# Altium PCB Oso.PcbDoc
Units mm, origin at the board's own origin, x right, y up, seen from the top; angles counter-clockwise.
Board outline 76.45 x 75.69 mm, 2 copper layers (Top Layer, Bottom Layer); 43 components, 38 nets, 178 pads, 20 vias.
Unrouted connection lines stored in the file: 40.
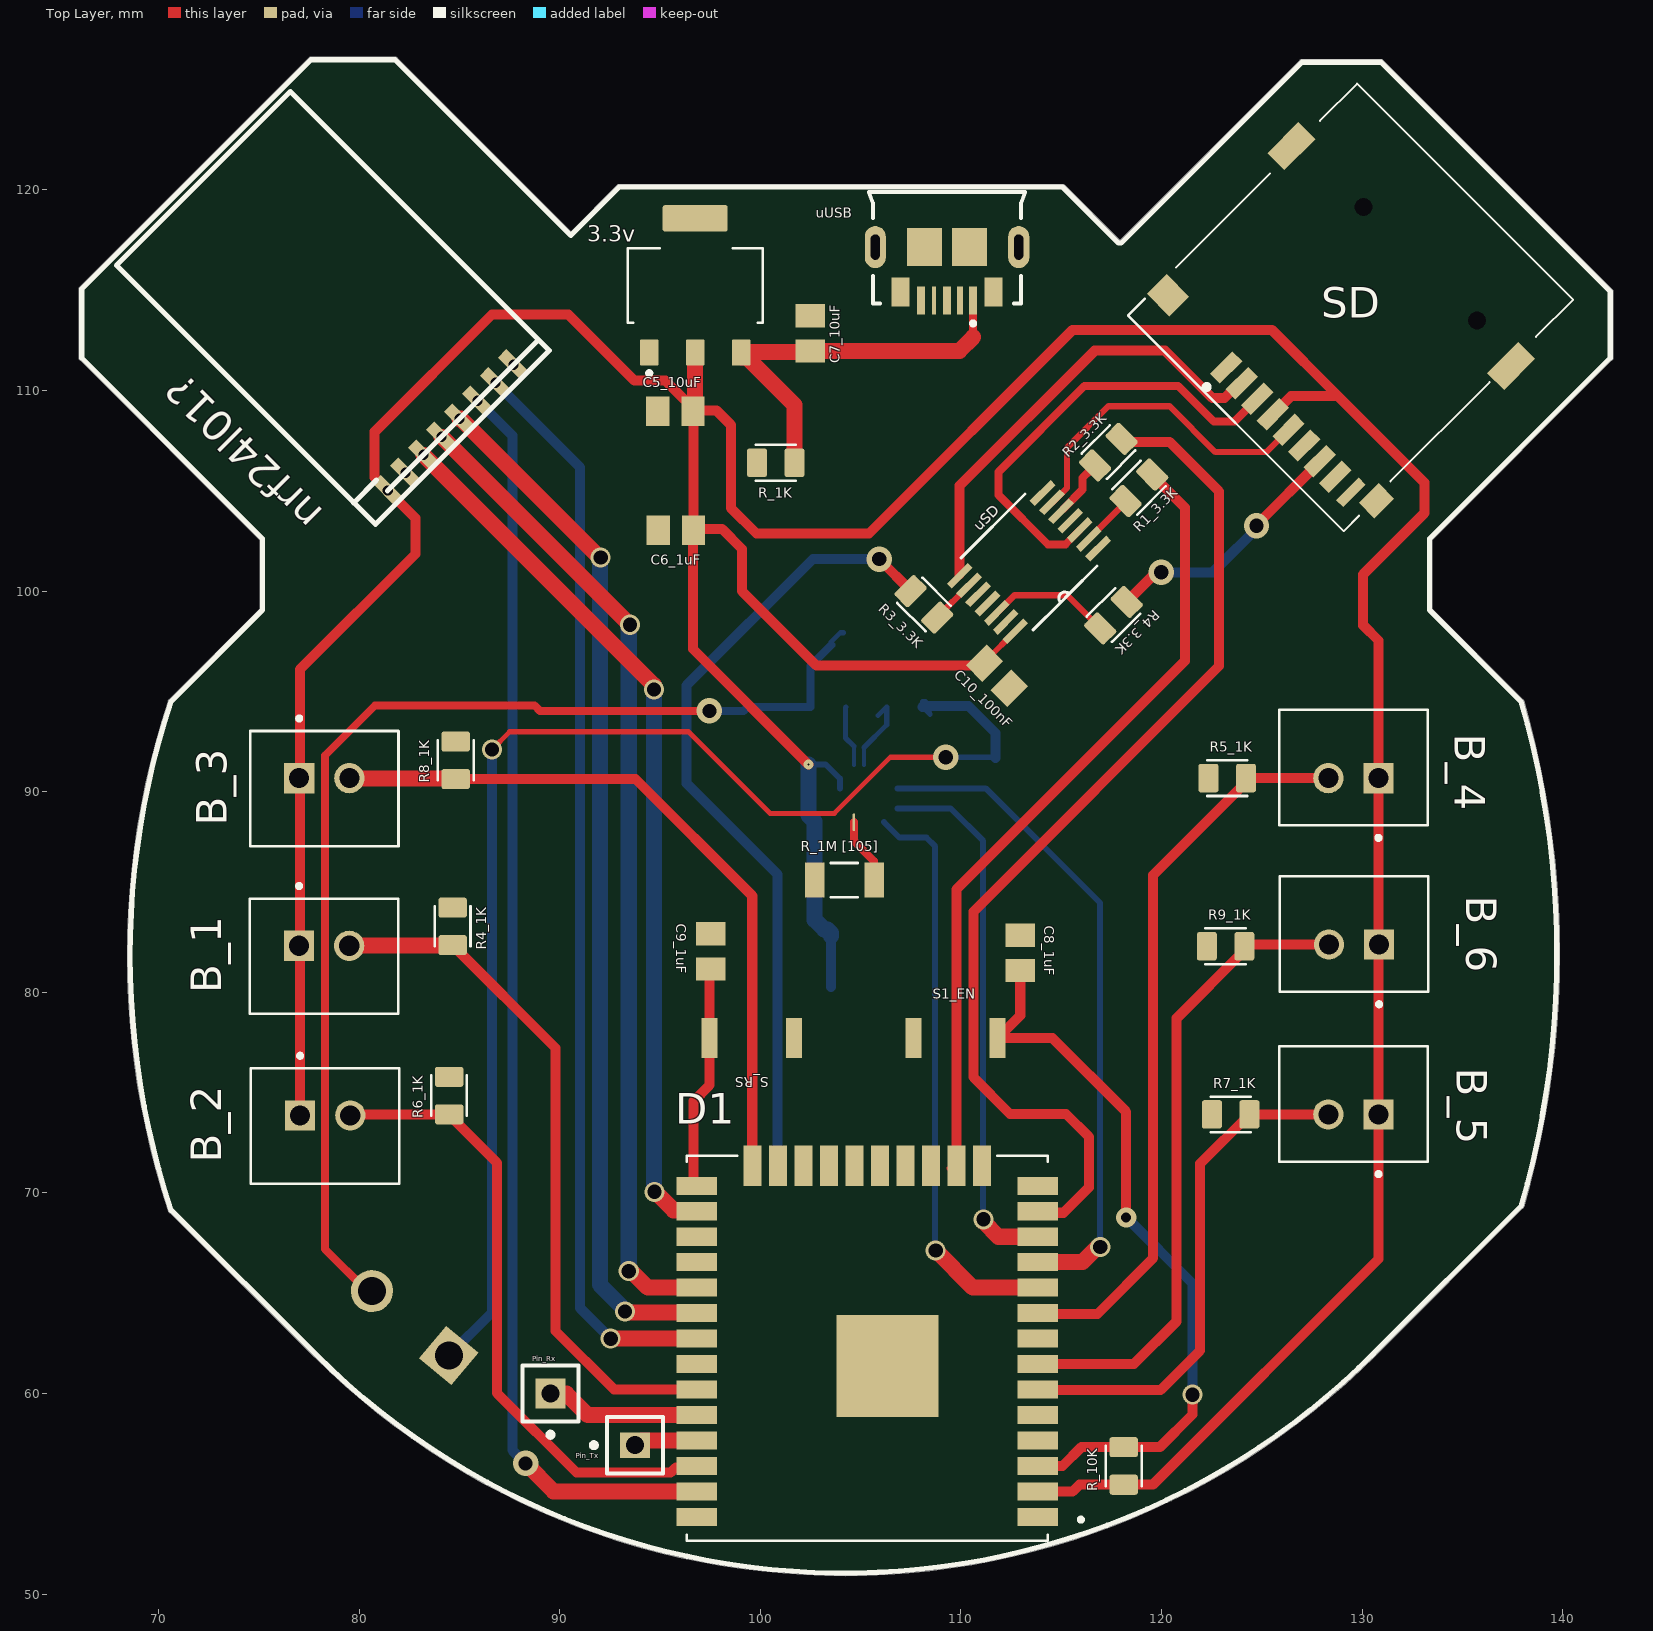
[diagram p0: Top Layer view]
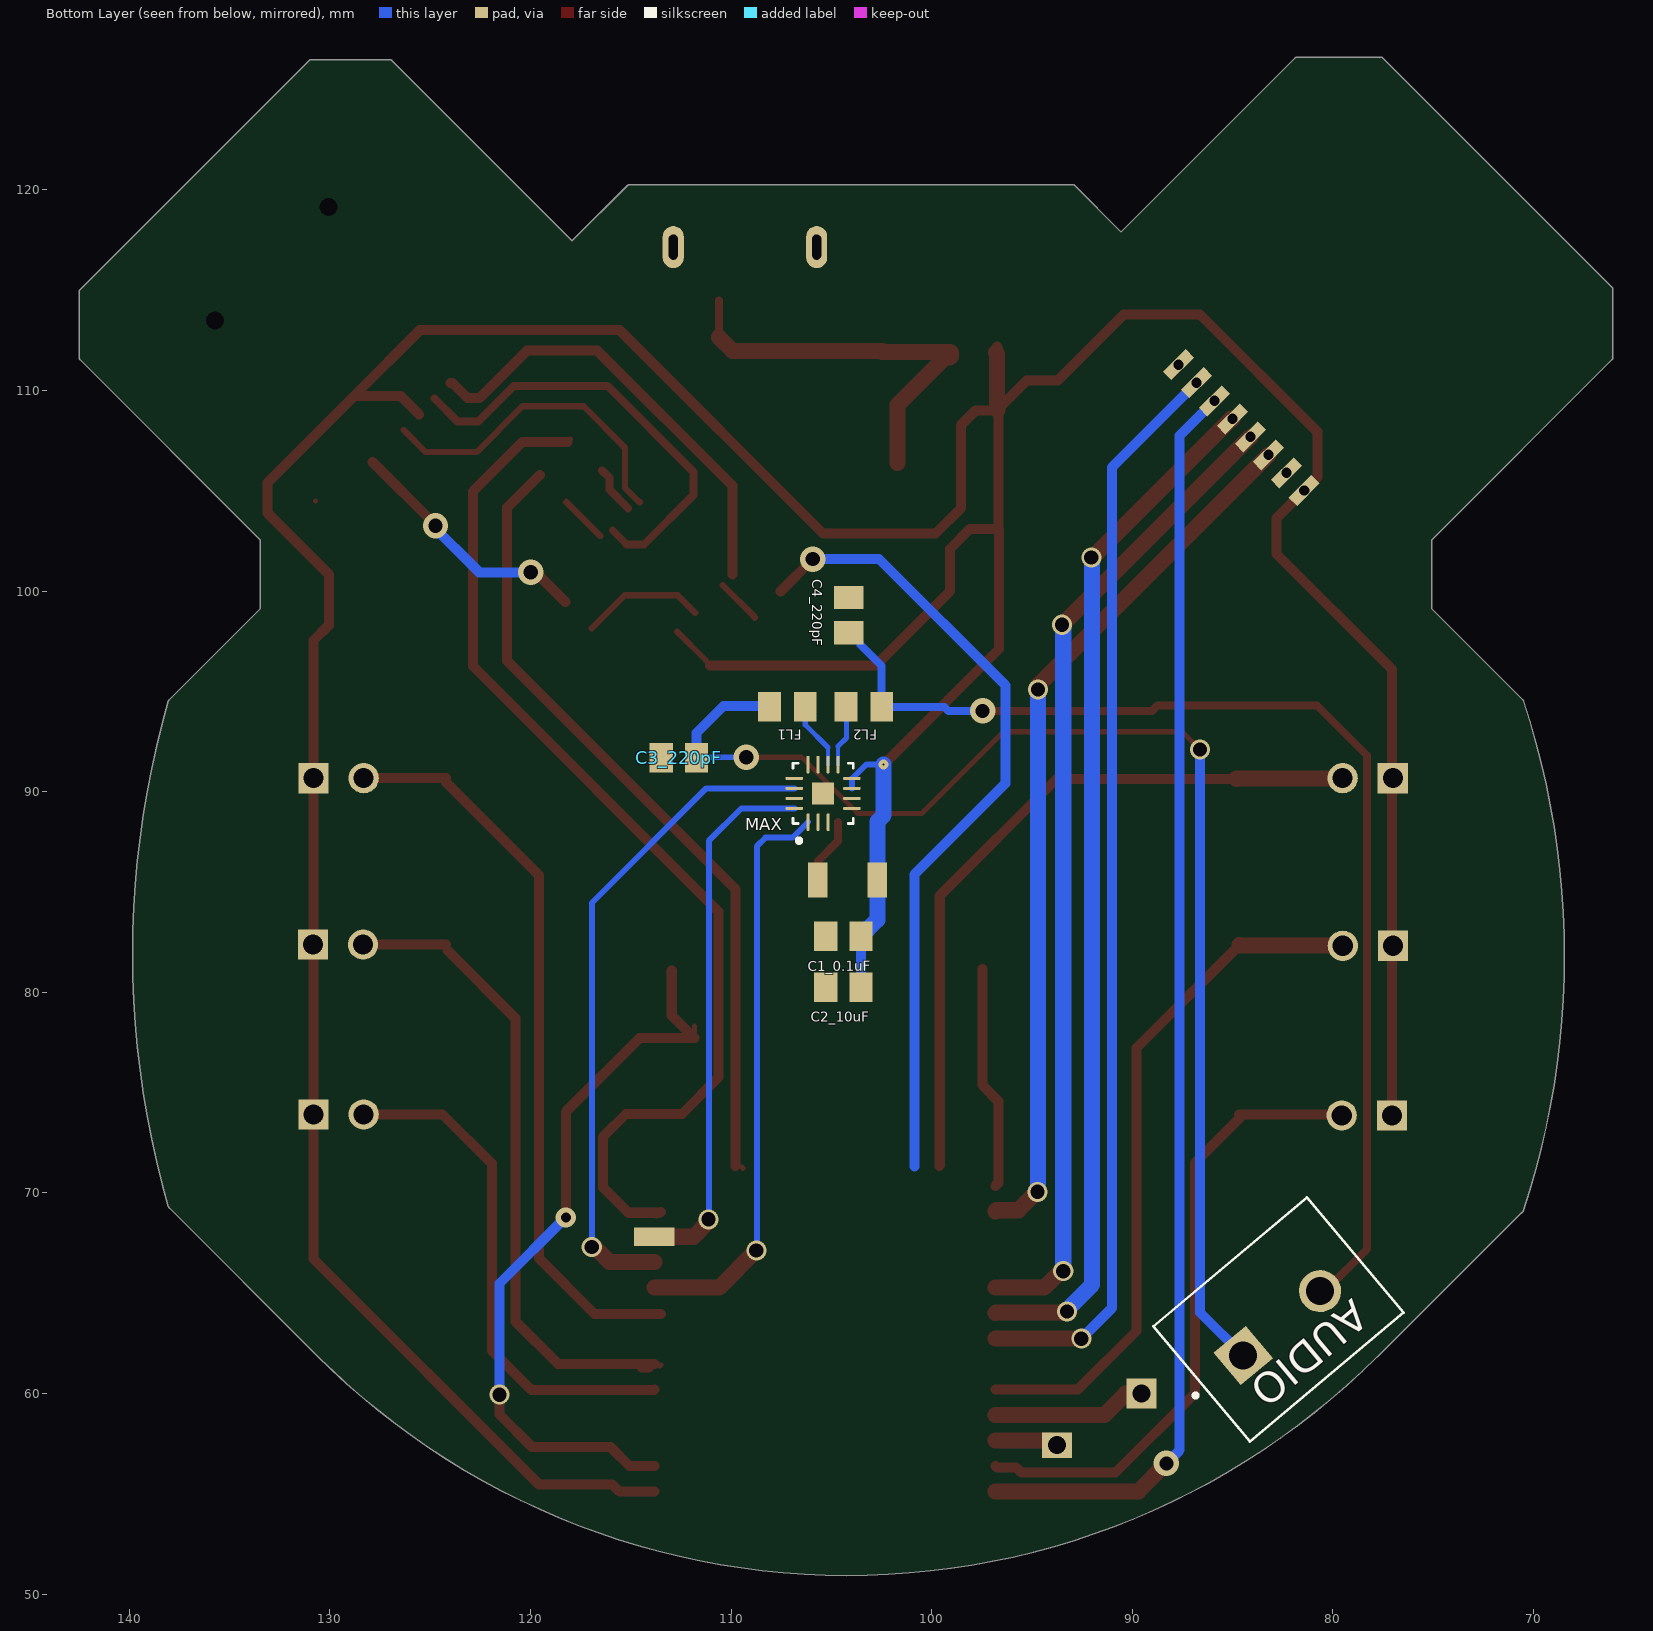
[diagram p1: Bottom Layer view, seen from below]

## Layer stack, top to bottom
Top Solder: solder mask 0.0102, Solder Resist, Dk 3.5
Top Layer: signal copper 0.0356
Dielectric 1: dielectric 0.32, FR-4, Dk 4.8
Bottom Layer: signal copper 0.0356
Bottom Solder: solder mask 0.0102, Solder Resist, Dk 3.5

## Board outline
70.503,69.095 cw(c109.019,81.83) 70.491,94.528 cw(c70.612,94.488) 70.522,94.579 70.522,94.578 75.057,99.113 75.057,102.563 66.077,111.543 cw(c66.167,111.633) 66.057,111.697 cw(c66.167,111.76) 66.04,111.76 66.04,115.062 cw(c66.167,115.062) 66.077,115.153 66.077,115.152 77.507,126.582 cw(c77.597,126.492) 77.66,126.602 cw(c77.724,126.492) 77.724,126.619 81.788,126.619 cw(c81.788,126.492) 81.879,126.582 81.878,126.582 90.551,117.909 92.874,120.232 92.873,120.232 cw(c92.964,120.142) 92.964,120.269 115.062,120.269 cw(c115.062,120.142) 115.153,120.232 115.152,120.232 117.919,117.465 126.91,126.455 126.909,126.455 cw(c127,126.365) 127,126.492 130.937,126.492 cw(c130.937,126.365) 131.028,126.455 131.027,126.455 142.457,115.025 142.457,115.026 cw(c142.367,114.935) 142.494,114.935 142.494,111.633 cw(c142.367,111.633) 142.457,111.542 142.457,111.543 133.477,102.563 133.477,99.113 138.012,94.578 cw(c137.922,94.488) 138.045,94.523 cw(c94.357,81.915) 139.828,81.915 cw(c94.357,81.915) 138.045,69.307 cw(c137.922,69.342) 137.97,69.224 130.683,61.937 ccw(c130.593,62.027) 130.684,61.937 130.683,61.937 cw(c104.18,88.33) 77.788,61.826 cw(c77.878,61.917) 77.788,61.827 70.587,69.014 cw(c70.624,69.135)

## Design rules (kind name [scope] priority, off if disabled: settings)
Clearance [All] p1: gap=0.254 ignorepadtopadclearanceinfootprint=FALSE except(0: Arc-Hole Track-Hole SMDPad-Hole THPad-Hole Via-Hole Fill-Hole Poly-Hole Region-Hole Text-Hole)
PolygonConnect [All] p1: connectstyle=Relief reliefconductorwidth=0.254 reliefentries=4 polygonreliefangle="90 Angle" airgapwidth=0.254
RoutingVias [All] p1: holewidth=0.711 width=1.27 viastyle="Through Hole" minholewidth=0.711 minwidth=1.27 maxholewidth=0.711 maxwidth=1.27
SolderMaskExpansion [All] p1: expansion=0.102 istentingtop=FALSE
Width [All] p1: maxlimit=0.8 minlimit=0.254 preferedwidth=0.8
30 further rules are at their usual default settings.

## Components (designator, comment, footprint, x,y, rotation, side; value= is the part's Value field where it differs from the comment)
3.3v "AMS1117-3.3" SOT229P700X180-4N 96.749,115.24 r0 top (schematic designator U)
AUDIO "KF301-2P" HANDSON_KF301-2P 82.55,63.5 r140 bottom
B_1 "" JST_B2B-XH-A(LF)(SN) 78.252,81.796 r180 top
B_2 "" JST_B2B-XH-A(LF)(SN) 78.303,73.338 r180 top
B_3 "" JST_B2B-XH-A(LF)(SN) 78.257,90.153 r180 top
B_4 "" JST_B2B-XH-A(LF)(SN) 129.56,91.203 r0 top
B_5 "" JST_B2B-XH-A(LF)(SN) 129.56,74.439 r0 top
B_6 "" JST_B2B-XH-A(LF)(SN) 129.591,82.906 r0 top
C1_0.1uF "0805" CAPC2012X94N 104.394,82.804 r0 bottom
C2_10uF "0805" CAPC2012X94N 104.394,80.264 r0 bottom
C3_220pF "0805" CAPC2012X94N 112.598,91.694 r0 bottom
C4_220pF "0805" CAPC2012X94N 104.14,98.806 r90 bottom
C5_10uF "0805" CAPC2012X94N 95.758,108.966 r0 top
C6_1uF "0805" CAPC2012X94N 95.783,103.048 r0 top
C7_10uF "0805" CAPC2012X94N 102.489,112.852 r270 top
C8_1uF "0805" CAPC2012X94N 112.954,81.966 r270 top
C9_1uF "0805" CAPC2012X94N 97.536,82.042 r270 top
C10_100nF "0805" CAPC2012X94N 111.785,95.783 r135 top
D1 "ESP32_MODULE_2" XCVR_ESP32-WROOM-32U 105.324,62.255 r180 top
FL1 "Ferrite Beads" BEADC2012X105N 107.188,94.234 r0 bottom
FL2 "Ferrite Beads" BEADC2012X105N 103.378,94.234 r180 bottom
MAX "MAX98357AETE+" QFN50P300X300X80-17N 105.41,89.916 r90 bottom
nrf24l01? "SMD" NRF24L01 81.944,104.463 r135 top
Pin_Rx "Socket" PIN1#1 89.535,59.995 r180 top
Pin_Tx "Socket" PIN1#2 93.745,57.423 r90 top
R1_3.3K "0805" RESC2012X65N 118.872,105.156 r45 top
R2_3.3K "0805" RESC2012X65N 117.348,106.934 r45 top
R3_3.3K "0805" RESC2012X65N 108.153,99.339 r135 top
R4_1K "0805" RESC2012X65N 84.658,83.287 r90 top
R4_3.3K "0805" RESC2012X65N 117.602,98.806 r45 top
R5_1K "0805" RESC2012X65N 123.271,90.678 r0 top
R6_1K "0805" RESC2012X65N 84.48,74.854 r90 top
R7_1K "0805" RESC2012X65N 123.444,73.914 r0 top
R8_1K "0805" RESC2012X65N 84.811,91.567 r90 top
R9_1K "0805" RESC2012X65N 123.19,82.296 r0 top
R_1K "0805" RESC2012X65N 100.767,106.401 r0 top
"R_1M [105]" "RC1206" RESC3116X65N 104.184,85.598 r180 top
R_10K "0805" RESC2012X65N 118.11,56.388 r90 top
S1_EN "SW-PB" SKRK 109.728,77.724 r180 top
S_RS "SW-PB" SKRK 99.568,77.724 r0 top
SD "Micro SD Card Holder" "Micro SD Card Holder" 130.117,114.255 r135 top
uSD "74LVC125APW,118" SOP65P640X110-14N 113.386,101.448 r225 top
uUSB "USB3075-30-A" GCT_USB3075-30-A 110.603,114.5 r180 top (schematic designator J1)

## Footprints (in the part's own frame and the unit in brackets; to place one, negate y for a bottom-side part, rotate by r counter-clockwise, add the part's x,y. Pads: shape width x height; smd on the part's side, far side on the other; paste and mask are expansions set on the pad)
BEADC2012X105N [mm]
  rect 1.14x1.47 smd: 1(-0.89,0) 2(0.89,0)
CAPC2012X94N [mm]
  rect 1.16x1.47 smd: 1(-0.88,0) 2(0.88,0)
GCT_USB3075-30-A [mm]
  rect 0.4x1.4 smd: 1(0,0) 3(1.3,0) 5(2.6,0)
  rect 0.3x1.4 smd: 2(0.65,0)
  rect 0.2x1.4 smd: 4(1.95,0)
  rect 0.9x1.45 smd: S1(-1.02,-0.42) S2(3.62,-0.42)
  rect 1.75x1.9 smd: S3(0.175,-2.65) S4(2.425,-2.65)
  oval 1.05x2.1 hole 0.45 slot 1.25 at 90 deg: S5(-2.275,-2.65) S6(4.875,-2.65)
  silkscreen extent -2.6,-5.4 5.2,1.25, body extent -2.63,-5.31 5.17,0.24, height 2.7
HANDSON_KF301-2P [mm]
  rect 2.1x2.1 hole 1.4: 1(-2.5,0)
  round 2.1 hole 1.4: 2(2.5,0)
  silkscreen extent -5.7,-3.5 5,4
JST_B2B-XH-A(LF)(SN) [mm]
  rect 1.508x1.508 hole 1: 1(1.25,-0.525)
  round 1.508 hole 1: 2(-1.25,-0.525)
  silkscreen extent -3.7,-3.6 3.7,2.88, body extent -3.7,-2.96 3.7,2.79, height 7
"Micro SD Card Holder" [mm]
  rect 0.7x1.6 smd paste+0 mask+0: 1(2.684,7.075) 2(1.584,7.075) 3(0.484,7.075) 4(-0.616,7.075) 5(-1.716,7.075) 6(-2.816,7.075) 7(-3.916,7.075) 8(-5.016,7.075)
  rect 1.1x1.4 smd paste+0 mask+0: 10(-7.316,6.475)
  rect 1.6x1.4 smd paste+0 mask+0: 11(7.284,6.575)
  rect 1.2x2.2 smd paste+0 mask+0: 12(-7.316,-3.025) 13(8.184,-3.025)
  rect 0.5x1.6 smd paste+0 mask+0: Cd(-6.116,7.075)
  round 0 hole 0.9 unplated paste-1000 mask+0: ""(-4.516,-3.425) ""(3.484,-3.425)
  silkscreen extent -7.23,-7.55 8.08,8.7, body extent -7.57,-7.42 8.43,7.83, height 1.85
NRF24L01 [mil] "smd"
  rect 62.99x23.62 hole 20: 1(30,-1) 2(30,-49.99) 3(30,-100) 4(30,-150) 5(30,-200) 6(30,-250) 7(30,-300) 8(30,-350)
  silkscreen extent 0,-420 719,63, body extent -3,-412 706,60, height 32
PIN1#1 [mm] "Connector; Plug"
  rect 1.5x1.5 hole 0.9: 1(0,0)
  silkscreen extent -1.4,-1.4 1.4,2.17
PIN1#2 [mm] "Connector; Plug"
  rect 1.25x1.5 hole 0.9: 1(0,0)
  silkscreen extent -1.4,-1.4 1.4,2.17
QFN50P300X300X80-17N [mm]
  rrect50% 0.86x0.15 smd: 1(-1.435,0.75) 2(-1.435,0.25) 3(-1.435,-0.25) 9(1.435,-0.75) 10(1.435,-0.25) 11(1.435,0.25) 12(1.435,0.75)
  rrect50% 0.86x0.12 smd far side: 4(-1.435,-0.75)
  rrect50% 0.15x0.86 smd: 5(-0.75,-1.435) 6(-0.25,-1.435) 7(0.25,-1.435) 8(0.75,-1.435) 13(0.75,1.435) 14(0.25,1.435) 15(-0.25,1.435) 16(-0.75,1.435)
  rect 1.1x1.1 smd paste-2: 17(0,0)
  silkscreen extent -2.46,-1.5 1.5,1.5, body extent -1.5,-1.5 1.5,1.5, height 0.75
RESC2012X65N [mm]
  rrect25% 1x1.42 smd: 1(-0.935,0) 2(0.935,0)
  silkscreen extent -1,-0.89 1,0.89
RESC3116X65N [mm]
  rect 0.97x1.73 all layers, no hole: 1(-1.48,0) 2(1.48,0)
  silkscreen extent -0.67,-0.85 0.67,0.85
SKRK [mm]
  rect 0.8x2 smd: 1(-2.1,0) 2(2.1,0)
SOP65P640X110-14N [mil]
  rect 58x14 smd: 1(-115,77) 2(-115,51) 3(-115,26) 4(-115,0) 5(-115,-26) 6(-115,-51) 7(-115,-77) 8(115,-77) 9(115,-51) 10(115,-26) 11(115,0) 12(115,26) 13(115,51) 14(115,77)
  silkscreen extent -89,-100 89,100, body extent -131,-98 121,98, height 43
SOT229P700X180-4N [mm]
  rrect15% 0.93x1.31 smd: 1(-2.29,-3.345) 2(0,-3.345) 3(2.29,-3.345)
  rrect15% 3.24x1.31 smd: 4(0,3.345)
  silkscreen extent -3.36,-4.47 3.36,1.86, body extent -3.35,-3.52 3.35,3.78, height 1.91
XCVR_ESP32-WROOM-32U [mm]
  rect 2x0.9 smd: 1(-8.5,8.41) 2(-8.5,7.14) 3(-8.5,5.87) 4(-8.5,4.6) 5(-8.5,3.33) 6(-8.5,2.06) 7(-8.5,0.79) 8(-8.5,-0.48) 9(-8.5,-1.75) 10(-8.5,-3.02) 11(-8.5,-4.29) 13(-8.5,-6.83) 14(-8.5,-8.1) 25(8.5,-8.1) 26(8.5,-6.83) 27(8.5,-5.56) 28(8.5,-4.29) 29(8.5,-3.02) 30(8.5,-1.75) 31(8.5,-0.48) 32(8.5,0.79) 33(8.5,2.06) 34(8.5,3.33) 35(8.5,4.6) 36(8.5,5.87) 37(8.5,7.14) 38(8.5,8.41)
  rect 2x0.9 all layers, no hole: 12(-8.5,-5.56)
  rect 0.9x2 smd: 15(-5.715,-9.1) 16(-4.445,-9.1) 17(-3.175,-9.1) 18(-1.905,-9.1) 19(-0.635,-9.1) 20(0.635,-9.1) 21(1.905,-9.1) 22(3.175,-9.1) 23(4.445,-9.1) 24(5.715,-9.1)
  rect 5.08x5.08 smd: 39(-1.016,0.889)
  silkscreen extent -10.75,-9.6 9,9.6, body extent -9.04,-9.65 9.04,9.59, height 3.4

## Part data
3.3v: "Sot223/Pkg 1-Amp 3.3-Volt Low Drop Out Voltage Regulatator", Package=None, Availability=Unavailable, MF="Advanced Monolithic Systems", MP=AMS1117-3.3, Price=None, SnapEDA_Link=https://www.snapeda.com/parts/AMS1117-3.3/Advanced%20Monolithic%20Systems/view-part/53450/?ref=snap
AUDIO: "2 Pin Terminal Block 5mm Pitch", Package=Package, Availability=Unavailable, MF="Handson Technology", MP=KF301-2P, Price=None, SnapEDA_Link=https://www.snapeda.com/parts/KF301-2P/Handson%20Technology/view-part/4276957/?ref=snap
B_1 B_2 B_3 B_4 B_5 B_6: library part B2B-XH-A(LF)(SN), "Connector Header Through Hole 2 position 0.098 (2.50mm)", Package=None, Availability="In Stock", Check_prices=https://www.snapeda.com/parts/B2B-XH-A(LF)(SN)/JST%20Sales%20America%20Inc./view-part/492310/?ref=eda, MF="JST Sales", MP=B2B-XH-A(LF)(SN), Price=None, Purchase-URL=https://pricing.snapeda.com/search/part/B2B-XH-A(LF)(SN)/?ref=eda, SnapEDA_Link=https://www.snapeda.com/parts/B2B-XH-A(LF)(SN)/JST%20Sales%20America%20Inc./view-part/492310/?ref=snap
C1_0.1uF C2_10uF C3_220pF C4_220pF C5_10uF C6_1uF C7_10uF C8_1uF C9_1uF C10_100nF: library part 0805YC103J4T2A, "10000pF Â±5% 16V Ceramic Capacitor X7R 0805 _2012 Metric_", Package="2012 AVX", Availability=Unavailable, MF=AVX, MP=0805YC103J4T2A, Price=None, SnapEDA_Link=https://www.snapeda.com/parts/0805YC103J4T2A/AVX/view-part/606803/?ref=snap
FL1 FL2: library part BLM21PG221BH1D, Package=None, Availability=Unavailable, MP=BLM21PG221BH1D, Price=None
MAX: "Amplifier IC 1-Channel _Mono_ Class D 16-TQFN _3x3_", Package="TQFN-16 Maxim", Availability=Unavailable, MF="Maxim Integrated", MP=MAX98357AETE+, Price=None, SnapEDA_Link=https://www.snapeda.com/parts/MAX98357AETE%2B/Maxim%20Integrated/view-part/229145/?ref=snap
nrf24l01?: library part nrf24l01_smd
R1_3.3K R2_3.3K R3_3.3K R4_1K R4_3.3K R5_1K R6_1K R7_1K R8_1K R9_1K R_1K R_10K: library part 2-2176053-0, "RES 0.33 OHM 1% 1/4W 0805", Power_Rating=".25 W", Resistance=.33, Tolerance=1%, Availability=Unavailable, EU_RoHS_Compliance="Compliant with Exemptions", MF="TE Connectivity", MP=2-2176053-0, Package=0805, Price=None, SnapEDA_Link=https://www.snapeda.com/parts/2-2176053-0/TE%20Connectivity/view-part/2214508/?ref=snap
"R_1M [105]": library part RC1206JR-0713RL, "13 Ohms Â±5% 0.25W, 1/4W Chip Resistor 1206 _3216 Metric_ Moisture Resistant Thick Film", Package="3116 Yageo", Availability=Unavailable, MF=Yageo, MP=RC1206JR-0713RL, Price=None, SnapEDA_Link=https://www.snapeda.com/parts/RC1206JR-0713RL/Yageo/view-part/105893/?ref=snap
S1_EN S_RS: "Switch", LatestRevisionDate=17-Jul-2002, LatestRevisionNote="Re-released for DXP Platform.", PackageDescription="Switch; 2 Leads", PackageReference=SPST-2, Published=24-Mar-1999, Publisher="Altium Limited"
uSD: "IC BUF NON-INVERT 3.6V 14TSSOP", Package=None, Availability=Good, Check_prices=https://www.snapeda.com/parts/74LVC125APW,118/Nexperia/view-part/5160321/?ref=eda, MF="Nexperia USA Inc.", MP=74LVC125APW,118, Price=None, Purchase-URL=https://pricing.snapeda.com/search/part/74LVC125APW,118/?ref=eda, SnapEDA_Link=https://www.snapeda.com/parts/74LVC125APW,118/Nexperia/view-part/5160321/?ref=snap
uUSB: "USB - micro B USB 2.0 Receptacle Connector 5 Position Surface Mount, Right Angle; Through Hole", Package=None, Digi-Key_Part_Number=2073-USB3075-30-ACT-ND, Digi-Key_Purchase_URL=https://www.digikey.com/product-detail/en/gct/USB3075-30-A/2073-USB3075-30-ACT-ND/9859705?utm_source=snapeda&utm_medium=aggregator&utm_campaign=symbol, MF="Global Connector Technology", MP=USB3075-30-A, SnapEDA_Link=https://www.snapeda.com/parts/USB3075-30-A/Global%20Connector%20Technology/view-part/229370/?ref=snap
Pin_Rx Pin_Tx: LatestRevisionDate=17-Jul-2002, LatestRevisionNote="Re-released for DXP Platform.", Publisher="Altium Limited"

## Via types
v1: diameter 1, hole 0.711, Top Layer to Bottom Layer, 12 vias
v2: diameter 1.27, hole 0.711, Top Layer to Bottom Layer, 6 vias
v3: diameter 1, hole 0.5, Top Layer to Bottom Layer, 1 vias
v4: diameter 0.5, hole 0.1, Top Layer to Bottom Layer, 1 vias

## Nets (pads, with @x,y where several pads share a name; then routed paths per layer and width w, separated by ;. In a path a pad name is that pad's centre, name@x,y a point inside that pad or via, vN(x,y) a via of type N, cw(c..) or ccw(c..) an arc to the next point about the centre after c; other vN are vias at no path point)
3v3: 3.3v.2 "R_1M [105].2" B_1.1 B_2.1 B_3.1 B_4.1 B_5.1 B_6.1 C1_0.1uF.1 C2_10uF.1 C5_10uF.2 C6_1uF.2 C10_100nF.2 D1.2 MAX.7 MAX.8 nrf24l01?.1 R_10K.1 SD.4 uSD.14 | length 229.6
  Top Layer w0.254: C6_1uF.2 C6_1uF.2@96.714,103.099 ; C5_10uF.2@96.716,109.043 C5_10uF.2@96.742,109.017 ; C10_100nF.2@111.054,96.296 C10_100nF.2 ; 128.764,109.76 128.764,109.728 128.78,109.728
  Top Layer w0.3: C10_100nF.2@111.269,96.565 uSD.14
  Top Layer w0.5: B_2.1@77.038,73.758 77.038,90.678 77.038,96.088 82.804,101.854 82.804,103.639 nrf24l01?.1 80.772,105.671 80.772,107.95 86.614,113.792 90.424,113.792 93.726,110.49 95.269,110.49 C5_10uF.2@96.638,109.121 ; C6_1uF.2@96.638,103.048 96.638,97.113 v4(102.387,91.364) ; C6_1uF.2 C5_10uF.2@96.663,108.941 ; C6_1uF.2@96.714,103.099 98.095,103.099 99.085,102.108 99.085,100 102.789,96.296 C10_100nF.2@111.054,96.296 ; 3.3v.2@96.723,112.166 3.3v.2@96.749,112.192 ; C5_10uF.2@96.742,109.017 97.801,109.017 98.527,108.291 98.527,104.147 99.804,102.87 105.41,102.87 115.57,113.03 125.494,113.03 128.764,109.76 ; D1.2 115.567,55.115 115.905,55.453 R_10K.1 119.563,55.453 130.81,66.7 B_5.1 B_4.1 130.81,97.536 130.048,98.298 130.048,100.838 133.096,103.886 133.096,105.412 128.78,109.728 ; SD.4 126.461,109.728 128.764,109.728
  Top Layer w0.8: C5_10uF.2@96.716,109.044 96.734,109.062 96.734,111.83 3.3v.2@96.799,111.895
  Bottom Layer w0.1: MAX.8 MAX.8@103.985,90.666
  Bottom Layer w0.3: v4(102.387,91.364) 103.247,91.364 MAX.8@103.945,90.666 ; MAX.7 MAX.8
  Bottom Layer w0.5: C2_10uF.1 C1_0.1uF.1
  Bottom Layer w0.8: v4(102.387,91.364) 102.387,88.829 102.704,88.513 102.704,85.598 102.704,83.614 103.179,83.139 103.334,83.139 103.514,82.959 C1_0.1uF.1
GND: 3.3v.1 C1_0.1uF.2 C2_10uF.2 C3_220pF.2 C4_220pF.2 C5_10uF.1 C6_1uF.1 C7_10uF.1 C8_1uF.1 C9_1uF.1 C10_100nF.1 D1.1 D1.15 D1.38 D1.39 MAX.2 MAX.3 MAX.11 MAX.15 nrf24l01?.2 R4_1K.2 R5_1K.1 R6_1K.2 R7_1K.1 R8_1K.2 R9_1K.1 R_1K.1 S1_EN.2 S_RS.2 SD.10 SD.11 SD.12 SD.13 uSD.1 uSD.4 uSD.7 uSD.10 uSD.13 uUSB.5 | length 0
NetAUDIO_1: AUDIO.1 C3_220pF.1 FL1.2 | length 66.5
  Top Layer w0.254: v1(86.614,92.1) 87.503,92.989 96.418,92.989 100.482,88.925 103.683,88.925 106.477,91.719 v2(109.245,91.719)
  Bottom Layer w0.254: v2(109.245,91.719) 111.693,91.719 C3_220pF.1 ; FL1.2 108.078,94.489 108.181,94.489 108.227,94.488 108.259,94.477 108.305,94.33 108.454,93.858 FL1.2
  Bottom Layer w0.5: AUDIO.1 86.614,64.042 v1(86.614,92.1) ; FL1.2 108.114,94.27 110.378,94.27 111.718,92.93 C3_220pF.1
NetAUDIO_2: AUDIO.2 C4_220pF.1 FL2.2 | length 57.7
  Top Layer w0.254: AUDIO.2@80.384,65.107 AUDIO.2
  Top Layer w0.4: AUDIO.2@80.384,65.107 78.283,67.208 78.283,91.796 80.797,94.31 88.737,94.31 89.017,94.031 v2(97.46,94.031)
  Bottom Layer w0.254: 103.532,97.318 103.532,97.473 103.985,97.926 C4_220pF.1
  Bottom Layer w0.4: v2(97.46,94.031) 99.162,94.031 99.365,94.234 FL2.2 102.488,96.274 103.532,97.318
NetB_1_2: B_1.2 D1.33 R4_1K.1 | length 35
  Top Layer w0.5: B_1.2 B_1.2@79.654,82.169 ; R4_1K.1 89.789,77.221 89.789,63.119 92.713,60.195 D1.33
  Top Layer w0.8: B_1.2 79.517,82.337 84.643,82.337 R4_1K.1
NetB_2_2: B_2.2 D1.36 R6_1K.1 | length 31.7
  Top Layer w0.254: R6_1K.1@84.663,73.704 R6_1K.1@84.663,73.914
  Top Layer w0.5: B_2.2@79.553,73.914 R6_1K.1@84.663,73.914 ; R6_1K.1@84.663,73.704 86.868,71.499 86.868,60.018 90.828,56.058 95.529,56.058 95.783,56.312 96.75,56.312 D1.36
NetB_3_2: B_3.2 D1.24 R8_1K.1 | length 36
  Top Layer w0.5: R8_1K.1 93.772,90.632 99.593,84.811 99.593,71.371 D1.24
  Top Layer w0.8: B_3.2 79.53,90.655 84.788,90.655 R8_1K.1
NetB_4_2: B_4.2 D1.9 R5_1K.2 | length 37.2
  Top Layer w0.254: R5_1K.2@124.206,90.468 R5_1K.2
  Top Layer w0.5: D1.9@113.5,63.969 116.801,63.969 119.583,66.751 119.583,85.845 R5_1K.2@124.206,90.468 ; R5_1K.2 B_4.2
NetB_5_2: B_5.2 D1.6 R7_1K.2 | length 25.6
  Top Layer w0.5: D1.6 113.847,60.173 119.956,60.173 121.92,62.137 121.92,71.455 R7_1K.2 B_5.2
NetB_6_2: B_6.2 D1.7 R9_1K.2 | length 32.6
  Top Layer w0.254: D1.7@113.5,61.429 D1.7@113.551,61.379 ; R9_1K.2@124.125,82.086 R9_1K.2 R9_1K.2@124.21,82.381
  Top Layer w0.5: D1.7 118.615,61.465 120.752,63.602 120.752,78.713 R9_1K.2@124.125,82.086 ; D1.7@114.079,61.29 D1.7@114.46,61.29 ; R9_1K.2@124.21,82.381 B_6.2
NetC7_10uF_2: 3.3v.3 C7_10uF.2 R_1K.2 uUSB.1 | length 20.5
  Top Layer w0.4: 110.603,112.66 uUSB.1
  Top Layer w0.8: R_1K.2 101.702,109.279 99.341,111.64 99.104,111.64 99.039,111.705 3.3v.3 99.077,111.933 102.45,111.933 C7_10uF.2 109.915,111.972 110.603,112.66
NetC8_1uF_2: C8_1uF.2 D1.3 R_10K.2 S1_EN.1 | length 37.7
  Top Layer w0.254: S1_EN.1 S1_EN.1@111.828,78.324 ; v1@121.488,59.893 v1(121.539,59.944)
  Top Layer w0.5: C8_1uF.2 112.954,78.85 S1_EN.1 114.554,77.724 118.237,74.041 v3(118.237,68.783) ; D1.3 115.059,56.385 115.997,57.323 R_10K.2 119.909,57.323 121.539,58.953 v1(121.539,59.944)
  Bottom Layer w0.5: v3(118.237,68.783) 121.539,65.481 v1(121.539,59.944)
NetC9_1uF_2: C9_1uF.2 D1.25 S_RS.1 | length 11.2
  Top Layer w0.5: D1.25 96.672,70.507 96.672,74.574 97.468,75.37 S_RS.1 C9_1uF.2@97.468,81.162
NetD1_8: D1.8 uSD.11
NetD1_10: D1.10 MAX.1 | length 29
  Top Layer w0.8: v1(108.737,67.132) 110.594,65.275 D1.10
  Bottom Layer w0.3: MAX.1 106.923,87.718 108.269,87.718 108.712,87.274 v1@108.712,67.132
NetD1_11: D1.11 MAX.14 | length 33
  Top Layer w0.8: D1.11 116.05,66.545 116.814,67.31 v1(116.942,67.31)
  Bottom Layer w0.3: MAX.14 111.231,90.166 116.942,84.455 v1(116.942,67.31)
NetD1_12: D1.12 MAX.16 | length 26.9
  Top Layer w0.8: v1(111.125,68.682) 111.125,68.555 111.864,67.815 D1.12
  Bottom Layer w0.3: MAX.16 109.487,89.166 111.1,87.554 v1@111.1,68.682
NetD1_13: D1.13 R2_3.3K.2 | length 53.3
  Top Layer w0.254: R2_3.3K.2 R2_3.3K.2@118.158,107.447
  Top Layer w0.5: D1.13@113.5,69.049 113.504,69.046 D1.13@113.618,69.012 ; D1.13@113.589,69.012 D1.13@113.618,69.012 ; D1.13@113.715,68.983 D1.13@113.618,69.012 ; R2_3.3K.2@118.158,107.447 120.391,107.447 122.86,104.978 122.86,96.266 110.617,84.023 110.617,75.768 112.446,73.939 115.24,73.939 116.383,72.796 116.383,70.282 115.113,69.012 D1.13@113.618,69.012
NetD1_16: D1.16 R1_3.3K.2 | length 39.9
  Top Layer w0.254: D1.16@109.4,71.23 D1.16@109.454,71.284 ; R1_3.3K.2@119.533,105.791 R1_3.3K.2 ; 121.158,104.14 121.158,104.166
  Top Layer w0.5: D1.16 109.769,85.131 121.158,96.52 121.158,104.14 ; R1_3.3K.2@119.533,105.791 121.158,104.166
NetD1_23: D1.23 R3_3.3K.2 | length 40.4
  Top Layer w0.5: v2(105.918,101.6) R3_3.3K.2@107.543,99.975
  Bottom Layer w0.5: 100.863,71.308 100.863,85.877 96.321,90.42 96.321,95.305 102.616,101.6 v2(105.918,101.6)
NetD1_26: D1.26 nrf24l01?.3 | length 44
  Top Layer w0.8: nrf24l01?.3 94.691,95.308 v1(94.691,95.098) ; v1(94.725,70.053) 94.751,70.053 95.669,69.135 96.774,69.135 D1.26
  Bottom Layer w0.8: v1@94.691,70.053 v1(94.691,95.098)
NetD1_29: D1.29 nrf24l01?.4 | length 49.3
  Top Layer w0.8: nrf24l01?.4 84.113,107.696 93.485,98.324 v1(93.498,98.324) ; v1(93.436,66.102) 93.563,66.102 94.389,65.275 D1.29
  Bottom Layer w0.8: v1(93.436,66.102) 93.436,98.262 v1(93.498,98.324)
NetD1_30: D1.30 nrf24l01?.5 | length 51.4
  Top Layer w0.8: nrf24l01?.5 85.065,108.594 91.982,101.676 v1(92.038,101.676) ; v1(93.246,64.083) 93.285,64.044 96.785,64.044 D1.30
  Bottom Layer w0.8: v1@91.999,101.473 91.999,65.432 93.246,64.185 v1(93.246,64.083)
NetD1_31: D1.31 nrf24l01?.7 | length 54.3
  Top Layer w0.8: v1(92.535,62.735) D1.31
  Bottom Layer w0.5: nrf24l01?.7 91.014,106.17 91.014,64.256 v1(92.535,62.735)
NetD1_34: D1.34 Pin_Rx.1 | length 7.7
  Top Layer w0.8: Pin_Rx.1 90.322,59.995 91.392,58.925 D1.34
NetD1_35: D1.35 Pin_Tx.1 | length 3.2
  Top Layer w0.8: Pin_Tx.1 93.87,57.423 94.102,57.655 D1.35
NetD1_37: D1.37 nrf24l01?.6 | length 63.1
  Top Layer w0.8: v2(88.29,56.515) 89.69,55.115 D1.37
  Bottom Layer w0.5: nrf24l01?.6 87.63,107.758 87.63,57.175 v2(88.29,56.515)
NetFL1_1: FL1.1 MAX.10 | length 4
  Bottom Layer w0.2: MAX.10@105.16,91.341 105.16,92.198 105.168,92.206
  Bottom Layer w0.254: 105.168,92.206 106.298,93.336 FL1.1 FL1.1@105.855,93.791
NetFL2_1: FL2.1 MAX.9 | length 3.1
  Bottom Layer w0.2: MAX.9@104.66,91.341 104.66,92.266
  Bottom Layer w0.254: FL2.1 104.242,94.208 104.242,92.685 104.66,92.266
NetMAX_4: "R_1M [105].1" MAX.4 | length 3.3
  Top Layer w0.4: MAX.4 104.66,87.542 105.664,86.538 105.664,85.598
NetR1_3.3K_1: R1_3.3K.1 uSD.2 | length 2.4
  Top Layer w0.254: R1_3.3K.1@118.211,104.441 R1_3.3K.1
  Top Layer w0.32: uSD.2@116.519,102.749 R1_3.3K.1@118.211,104.441
NetR2_3.3K_1: R2_3.3K.1 uSD.5 | length 2.4
  Top Layer w0.254: R2_3.3K.1@116.423,106.009 R2_3.3K.1@116.433,106.019
  Top Layer w0.4: uSD.5@115.136,104.132 116.064,105.06 116.064,105.65 R2_3.3K.1@116.423,106.009
NetR3_3.3K_1: R3_3.3K.1 uSD.9 | length 2.3
  Top Layer w0.32: R3_3.3K.1 108.814,98.708 uSD.9
NetR4_3.3K_1: R4_3.3K.1 uSD.12 | length 6.2
  Top Layer w0.32: uSD.12 112.669,99.797 115.289,99.797 R4_3.3K.1
NetR4_3.3K_2: R4_3.3K.2 SD.7 | length 12.9
  Top Layer w0.254: v2@119.736,100.94 v2(119.977,100.94)
  Top Layer w0.5: R4_3.3K.2 v2@119.736,100.94 ; v2@124.732,103.294 SD.7@127.883,106.445
  Top Layer w0.8: v2(124.732,103.257) v2@124.732,103.294
  Bottom Layer w0.5: v2(119.977,100.94) 122.555,100.94 v2@125.044,103.429
NetSD_2: SD.2 uSD.8 | length 22.6
  Top Layer w0.5: uSD.8@109.931,100.838 109.931,105.258 116.662,111.989 120.167,111.989 122.53,109.626 123.138,109.626 123.883,110.372 SD.2
NetSD_3: SD.3 uSD.3 | length 22.4
  Top Layer w0.35: 115.209,102.337 uSD.3
  Top Layer w0.4: 115.209,102.337 114.325,102.337 111.862,104.8 111.862,105.943 116.154,110.236 120.824,110.236 122.602,108.458 123.635,108.458 SD.3
NetSD_5: SD.5 uSD.6 | length 16.4
  Top Layer w0.31: uSD.6 114.564,104.429 115.291,105.156 115.291,107.163 117.348,109.22 120.396,109.22 122.682,106.934 125.222,106.934 SD.5
pads on no net: 3.3v.4 D1.4 D1.5 D1.14 D1.17 D1.18 D1.19 D1.20 D1.21 D1.22 D1.27 D1.28 D1.32 MAX.5 MAX.6 MAX.12 MAX.13 MAX.17 nrf24l01?.8 SD. SD.1 SD.6 SD.8 SD.Cd uUSB.2 uUSB.3 uUSB.4 uUSB.S1 uUSB.S2 uUSB.S3 uUSB.S4 uUSB.S5 uUSB.S6

## Silkscreen, mask and mechanical layers (free items; w line width, h text height)
Top Overlay:
  lines w0.254: 70.624,69.135 cw(c109.019,81.83) 70.612,94.488 75.184,99.06 75.184,102.616 73.152,104.648 66.167,111.633 66.167,111.76 66.167,115.062 77.597,126.492 77.724,126.492 81.788,126.492 90.551,117.729 92.964,120.142 115.062,120.142 117.856,117.348 117.983,117.348 127,126.365 130.937,126.365 142.367,114.935 142.367,111.633 133.35,102.616 133.35,99.06 137.922,94.488 cw(c94.357,81.915) 137.922,69.342 ; 70.652,69.128 77.878,61.917 ccw(c104.18,88.33) 130.593,62.027 137.908,69.342 137.922,69.342 ; 137.922,69.342 137.922,69.342

## Text inside footprints (layer, text, board x,y; h text height)
uUSB: Mechanical 13 "PCB EDGE" at 104.887,118.555 h0.41 r180